# EAGLE board screw-front-a-1 (EAGLE 9.6.2)
N01: 901; N02: 902; N03: 903; N04: 904; N05: 905; N06: 906; N07: 907; N08: 908; N09: 909; N10: 910; N11: 911; N12: 912; N13: 913; N14: 914; N15: 915; N16: 916
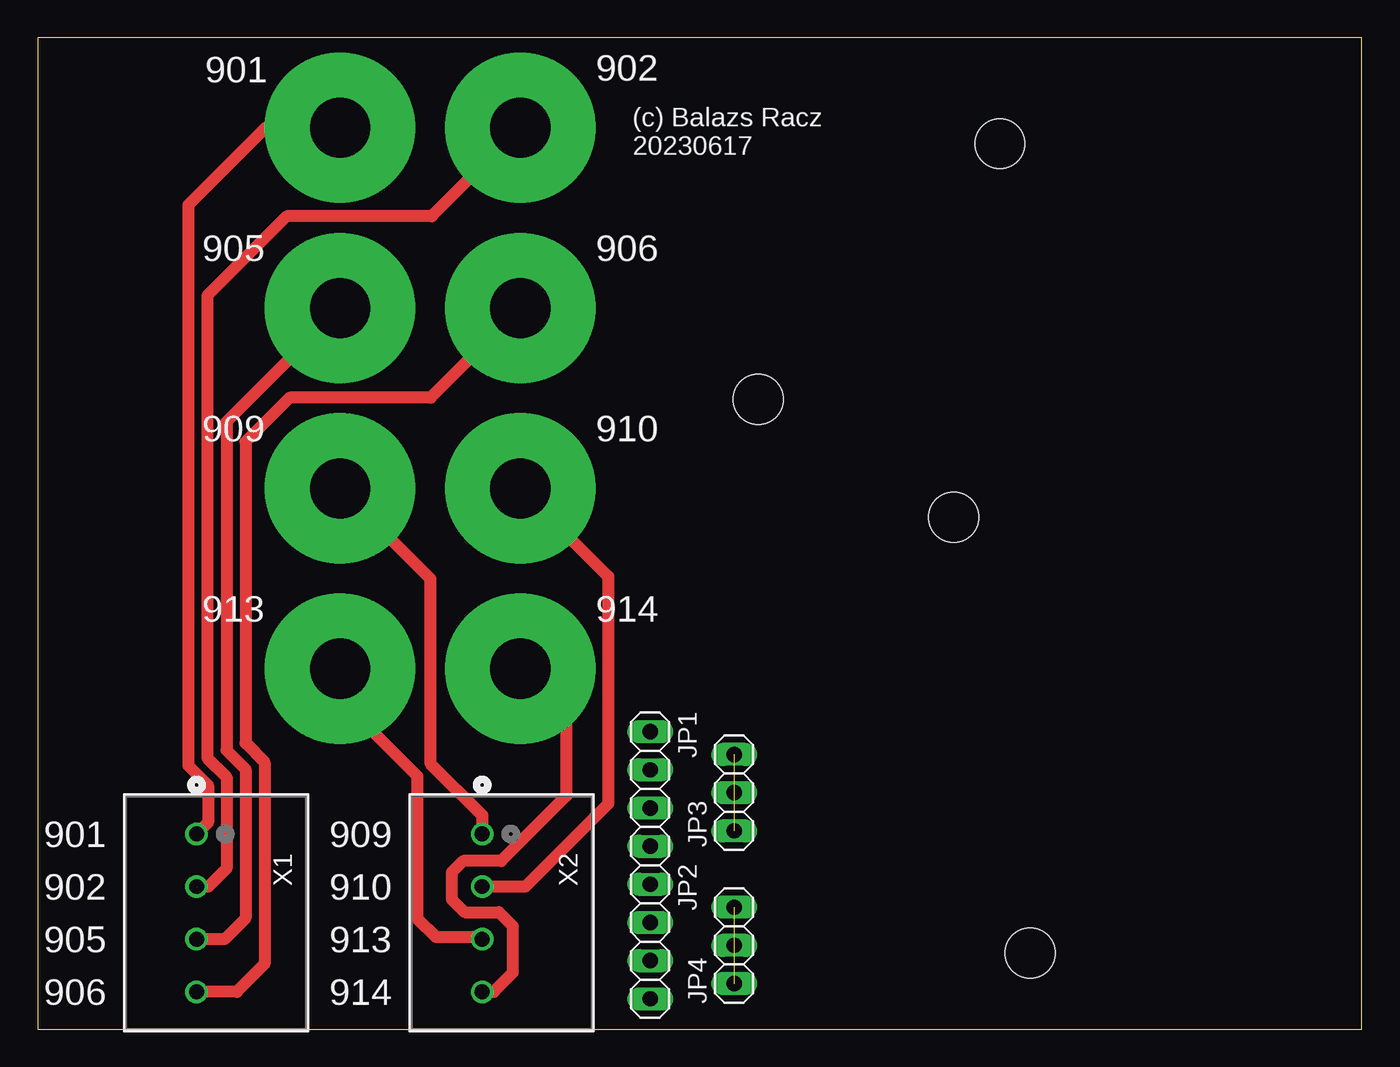
[diagram p0: board, top side]
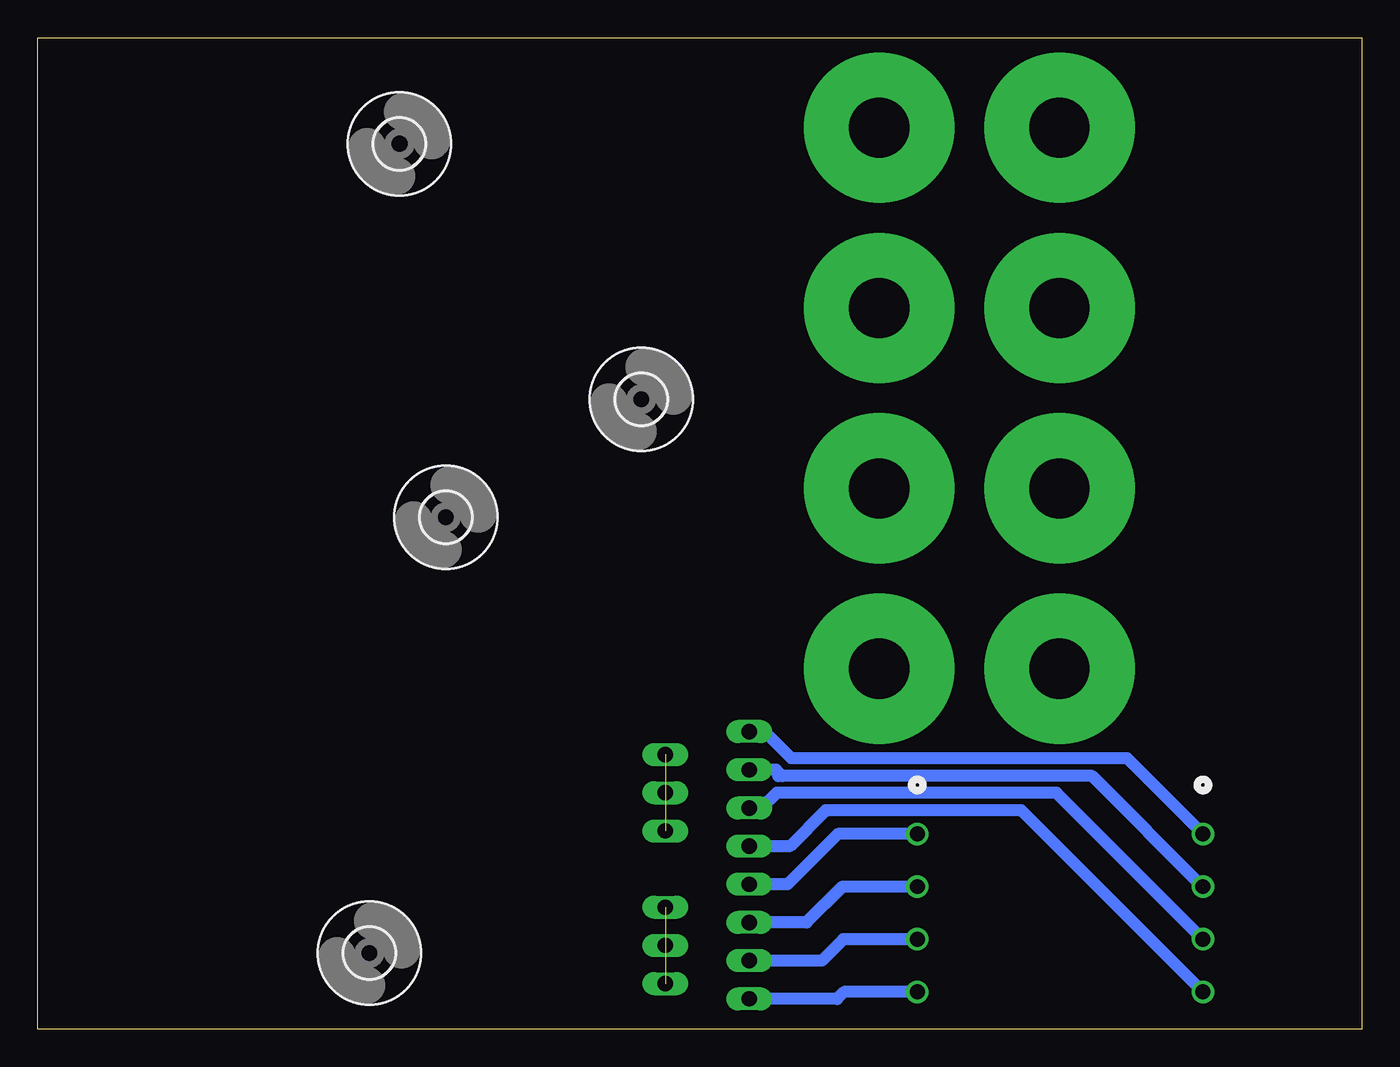
[diagram p1: board, bottom side, seen from below]

Size 88.12 x 66 mm. Coordinates in mm from the lower left corner, seen from the top.
Outline: 0,0 88.12,0 88.12,66 0,66 0,0
Copper layers (1*16): Top 0.035mm / dielectric 1.5mm / Bottom 0.035mm
Design rules "SeeedStudio_2layer_DRU_no_angle_20140221": minimum track width 6mil, minimum drill 12mil, track to track 6mil, track to pad 6mil, pad to pad 6mil, via to via 6mil, smd to smd 0mil, copper to edge 10mil, drill to drill 10mil, minimum pad ring 10mil, minimum via ring 6mil, stop-mask expansion 2mil, vias tented up to drill 100mil, thermal gap 10mil

## Footprints (pad centres in the part's own frame; a part is rotated, then mirrored left to right if it is on the bottom)
3,3 = hole 3.3: 0,0
M4-SCREW-HOLE = drill 4 pad 10: P$1 0,0
1X04 = drill 1.016 long: 1 -3.81,0; 2 -1.27,0; 3 1.27,0; 4 3.81,0
1X03 = drill 1.016 long: 1 -2.54,0; 2 0,0; 3 2.54,0
PHNX_4P_350 = drill 0.991 pad 1.499: 1 0,0; 2 3.5,0; 3 7,0; 4 10.5,0

## Placement (x,y rotation side)
H1  MOUNT-HOLE3.3  [3,3]  47.95,41.93 0 bottom
H2  MOUNT-HOLE3.3  [3,3]  60.95,34.08 0 bottom
H3  MOUNT-HOLE3.3  [3,3]  66.04,5.08 0 bottom
H4  MOUNT-HOLE3.3  [3,3]  64.04,58.93 0 bottom
J1  M4-SCREW-HOLE  [M4-SCREW-HOLE]  20.12,60 0 top
J2  M4-SCREW-HOLE  [M4-SCREW-HOLE]  32.12,60 0 top
J3  M4-SCREW-HOLE  [M4-SCREW-HOLE]  20.12,48 0 top
J4  M4-SCREW-HOLE  [M4-SCREW-HOLE]  32.12,48 0 top
J5  M4-SCREW-HOLE  [M4-SCREW-HOLE]  20.12,36 0 top
J6  M4-SCREW-HOLE  [M4-SCREW-HOLE]  32.12,36 0 top
J7  M4-SCREW-HOLE  [M4-SCREW-HOLE]  20.12,24 0 top
J8  M4-SCREW-HOLE  [M4-SCREW-HOLE]  32.12,24 0 top
J9  M4-SCREW-HOLE  [M4-SCREW-HOLE]  46.12,-54 0 top  (outside the outline)
J10  M4-SCREW-HOLE  [M4-SCREW-HOLE]  57.12,-54 0 top  (outside the outline)
J11  M4-SCREW-HOLE  [M4-SCREW-HOLE]  -6.88,-96 0 top  (outside the outline)
J12  M4-SCREW-HOLE  [M4-SCREW-HOLE]  4.12,-96 0 top  (outside the outline)
J13  M4-SCREW-HOLE  [M4-SCREW-HOLE]  15.12,-96 0 top  (outside the outline)
J14  M4-SCREW-HOLE  [M4-SCREW-HOLE]  26.12,-96 0 top  (outside the outline)
J15  M4-SCREW-HOLE  [M4-SCREW-HOLE]  37.12,-96 0 top  (outside the outline)
J16  M4-SCREW-HOLE  [M4-SCREW-HOLE]  48.12,-96 0 top  (outside the outline)
JP1  [1X04]  40.76,16 270 top
JP2  [1X04]  40.76,5.84 270 top
JP3  [1X03]  46.35,15.75 90 top
JP4  [1X03]  46.35,5.59 90 top
JP5  [1X04]  -5.88,-105 0 top  (outside the outline)
JP6  [1X04]  5.12,-105 0 top  (outside the outline)
X1  PHNX_4P_350CONN_1984989_PXC  [PHNX_4P_350]  10.58,13 270 top
X2  PHNX_4P_350CONN_1984989_PXC  [PHNX_4P_350]  29.58,13 270 top
X3  PHNX_4P_350CONN_1984989_PXC  [PHNX_4P_350]  8.12,-26 0 top  (outside the outline)
X4  PHNX_4P_350CONN_1984989_PXC  [PHNX_4P_350]  8.12,-68 0 top  (outside the outline)

## Library data of the parts
H1-H4 = holes
J1-J16 = eagleparts
JP1-JP6 = pinhead
X1-X4 = eagleparts; COPYRIGHT: Copyright (C) 2023 Ultra Librarian. All rights reserved.; MANUFACTURER_PART_NUMBER: 1984989; MFR_NAME: Phoenix Contact

## Nets
N$1: J1.P$1 JP1.1 X1.1
N$2: J2.P$1 JP1.2 X1.2
N$3: J3.P$1 JP1.3 X1.3
N$4: J4.P$1 JP1.4 X1.4
N$5: J5.P$1 JP2.1 X2.1
N$6: J6.P$1 JP2.2 X2.2
N$7: J7.P$1 JP2.3 X2.3
N$8: J8.P$1 JP2.4 X2.4
N$9: JP3.1 JP3.2 JP3.3
N$10: JP4.1 JP4.2 JP4.3
N$11: J9.P$1 JP5.1 X3.1
N$12: J10.P$1 JP5.2 X3.2
N$13: J11.P$1 JP5.3 X3.3
N$14: J12.P$1 JP5.4 X3.4
N$15: J13.P$1 JP6.1 X4.1
N$16: J14.P$1 JP6.2 X4.2
N$17: J15.P$1 JP6.3 X4.3
N$18: J16.P$1 JP6.4 X4.4

## Tracks (layer width: path | path; a pad name or v marks a point on that pad's centre or on a via)
N$1
  Top 0.813: J1.P$1 15.16,60 10.03,54.86 10.03,17.56 11.34,16.24 11.34,13.76 X1.1
  Bottom 0.813: X1.1 15.61,18.03 37.97,18.03 39.74,19.81 | 40,19.81 JP1.1
N$2  (1 unrouted)
  Top 0.813: J2.P$1 26.22,54.1 16.58,54.1 11.3,48.81 11.3,18.07 12.57,16.8 12.57,10.7 11.37,9.5 X1.2
  Bottom 0.813: X1.2 17.95,16.87 38.83,16.87 | 38.58,16.87 38.98,17.27 JP1.2
N$3
  Top 0.813: J3.P$1 12.57,40.45 12.57,18.57 13.84,17.3 13.84,7.4 12.44,6 X1.3
  Bottom 0.813: X1.3 20.33,15.75 38.92,15.75 39.94,14.73 | 39.69,14.73 JP1.3
N$4
  Top 0.813: J4.P$1 26.16,42.04 16.76,42.04 13.84,39.12 13.84,19.05 15.11,17.78 15.11,4.35 13.26,2.5 X1.4
  Bottom 0.813: X1.4 22.66,14.58 35.68,14.58 38.07,12.19 JP1.4
N$5
  Top 0.813: J5.P$1 26.13,29.99 26.13,17.71 29.58,14.26 X2.1
  Bottom 0.813: X2.1 34.87,13 38.22,9.65 JP2.1
N$6
  Top 0.813: J6.P$1 37.97,30.15 37.97,15.02 32.45,9.5 X2.2
  Bottom 0.813: X2.2 34.56,9.5 36.95,7.11 JP2.2
N$7
  Top 0.813: J7.P$1 20.12,22 25.27,16.85 25.27,7.4 26.54,6.13 29.45,6.13 X2.3
  Bottom 0.813: X2.3 34.51,6 35.93,4.57 JP2.3
N$8
  Top 0.813: J8.P$1 35.17,20.95 35.17,15.53 30.85,11.21 28.31,11.21 27.55,10.45 27.55,8.67 28.42,7.8 30.7,7.8 31.62,6.89 31.62,3.77 30.34,2.5 X2.4
  Bottom 0.813: X2.4 34.45,2.5 34.92,2.03 JP2.4
N$9  (2 unrouted)
N$10  (2 unrouted)
N$11  (2 unrouted)
N$12  (2 unrouted)
N$13  (2 unrouted)
N$14  (2 unrouted)
N$15  (2 unrouted)
N$16  (2 unrouted)
N$17  (2 unrouted)
N$18  (2 unrouted)

## Text on the board
tNames: (c) Balazs Racz / 20230617